# Altium PCB AD5541.PcbDoc
Units mm, origin at the board's own origin, x right, y up, seen from the top; angles counter-clockwise.
Board outline 64.13 x 29.21 mm, 2 copper layers (Top Layer, Bottom Layer); 40 components, 20 nets, 121 pads, 208 vias.
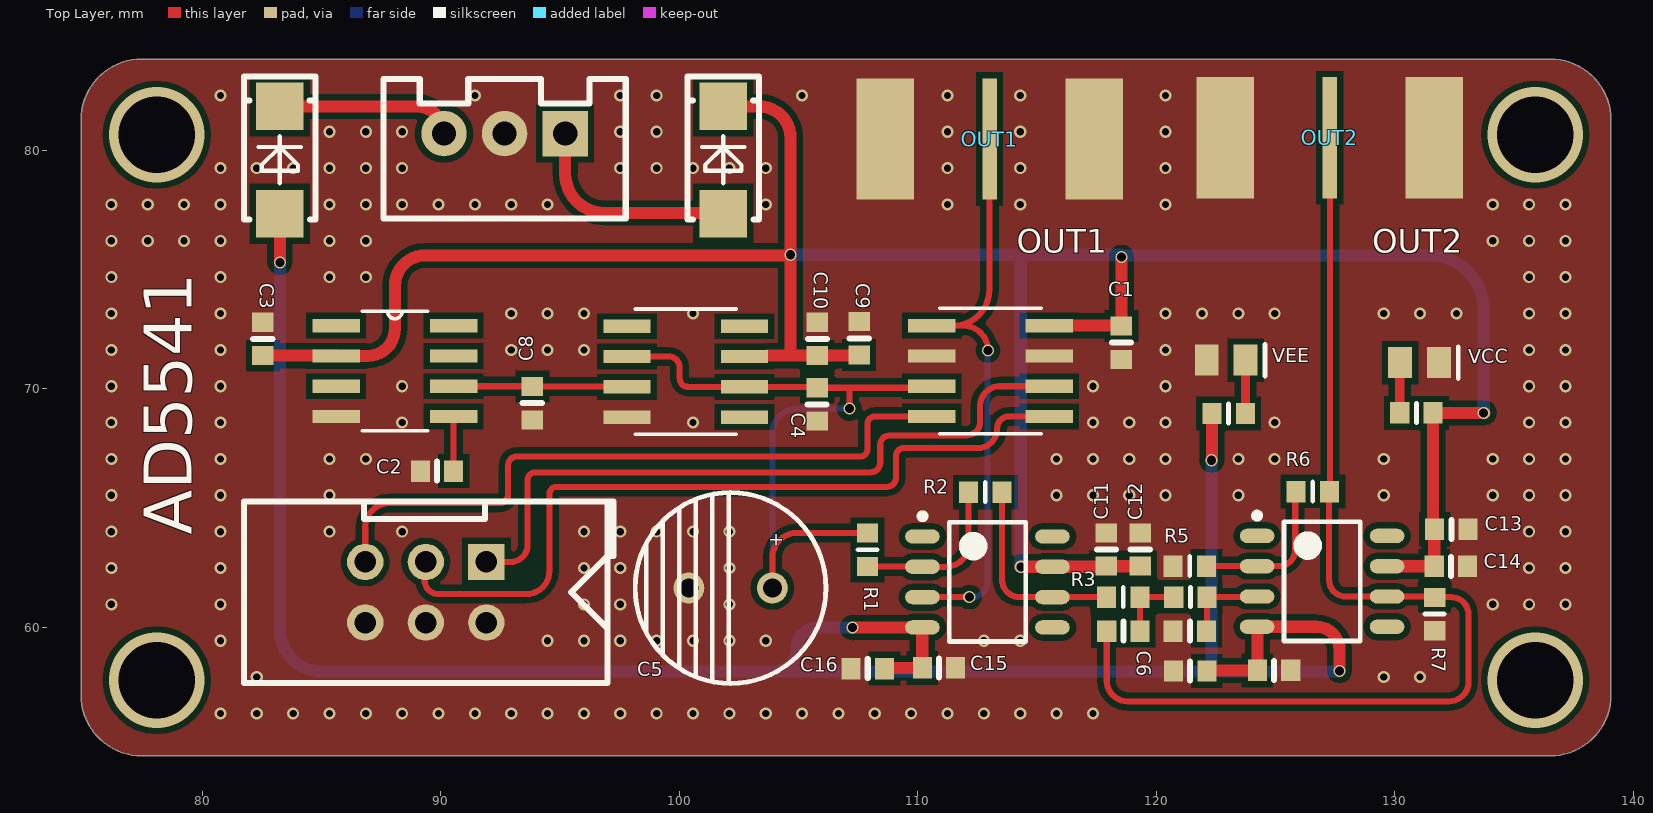
[diagram p0: Top Layer view]
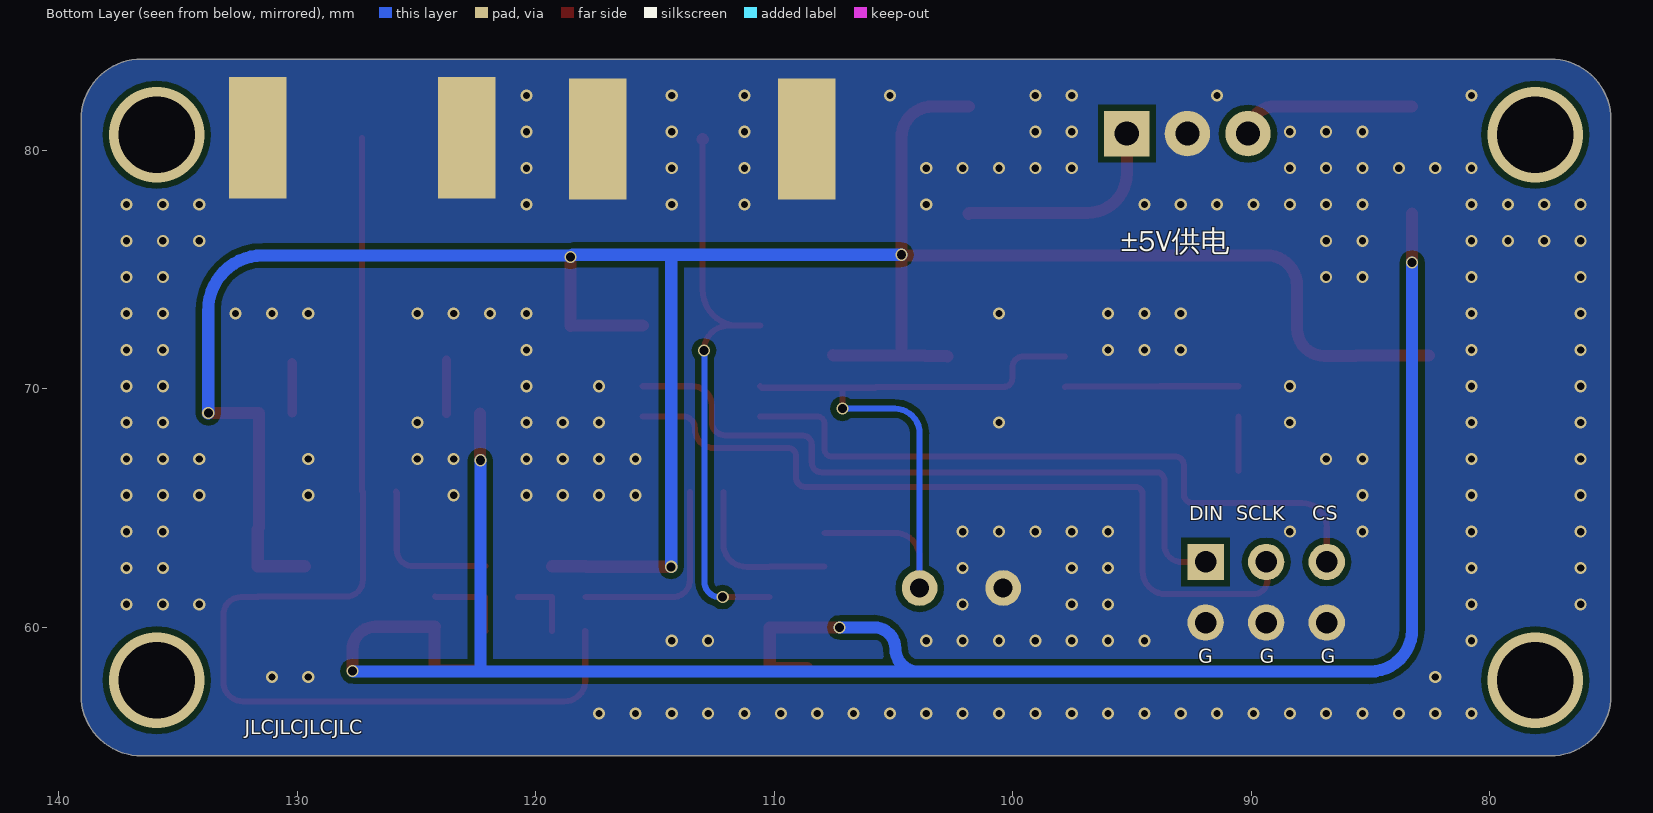
[diagram p1: Bottom Layer view, seen from below]
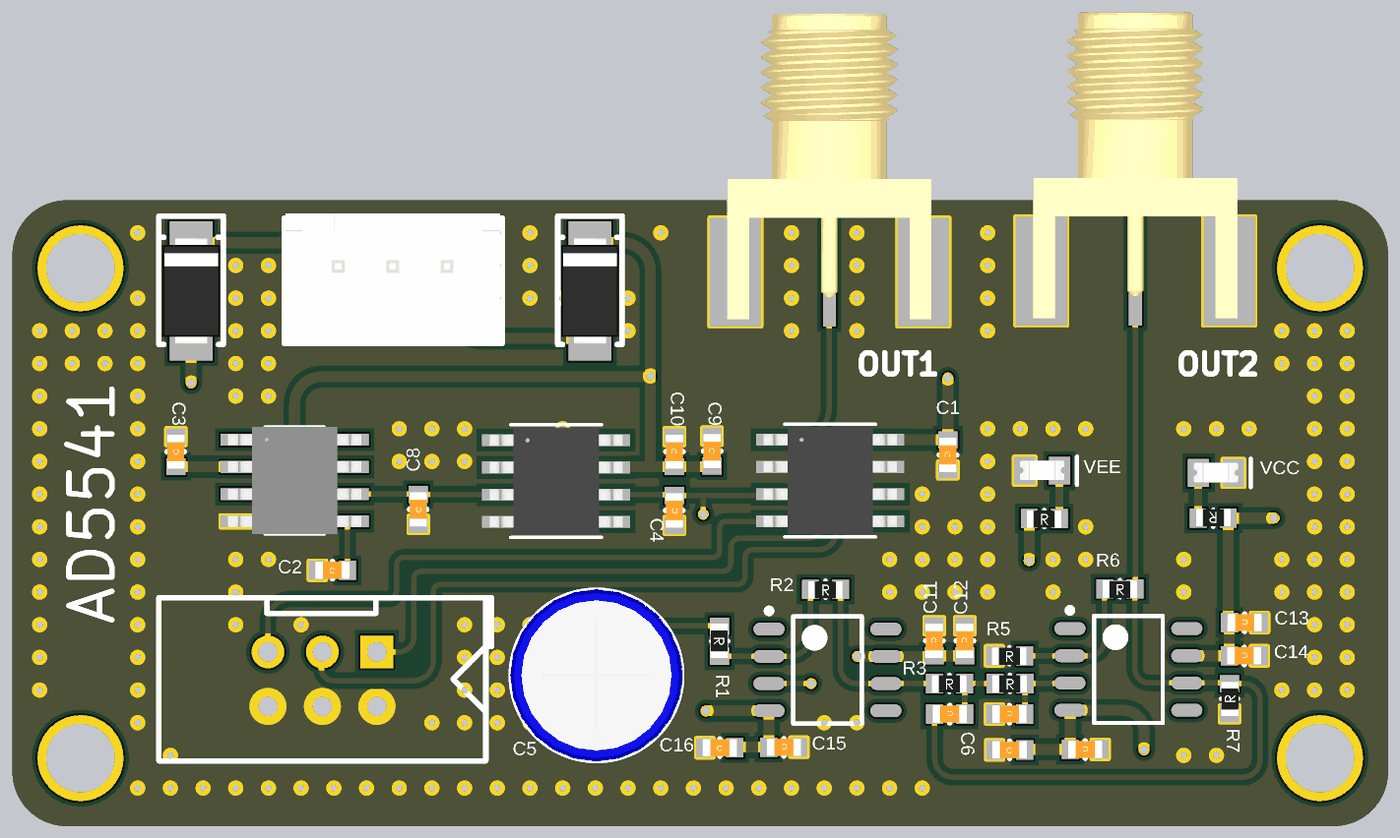
[diagram p2: 3D render of the assembled board from above, using the file's embedded part models]

## Layer stack, top to bottom
Top Solder: solder mask 0.0102, Solder Resist, Dk 3.5
Top Layer: signal copper 0.0356
Dielectric 1: dielectric 0.32, FR-4, Dk 4.8
Bottom Layer: signal copper 0.0356
Bottom Solder: solder mask 0.0102, Solder Resist, Dk 3.5

## Board outline
74.93,57.15 ccw(c77.47,57.15) 77.47,54.61 136.525,54.61 ccw(c136.525,57.15) 139.065,57.15 139.065,81.28 ccw(c136.525,81.28) 136.525,83.82 77.47,83.82 ccw(c77.47,81.28) 74.93,81.28

## Design rules (kind name [scope] priority, off if disabled: settings)
Clearance [All] p1: gap=0.254 ignorepadtopadclearanceinfootprint=FALSE except(0: Arc-Hole Track-Hole SMDPad-Hole THPad-Hole Via-Hole Fill-Hole Poly-Hole Region-Hole Text-Hole)
PolygonConnect [All] p1: connectstyle=Direct reliefconductorwidth=0.254 reliefentries=4 polygonreliefangle="90 Angle" airgapwidth=0.254
RoutingVias [All] p1: holewidth=0.711 width=1.27 viastyle="Through Hole" minholewidth=0.711 minwidth=1.27 maxholewidth=0.711 maxwidth=1.27
SolderMaskExpansion [All] p1: expansion=0.102 istentingtop=FALSE
Width [All] p1: maxlimit=2.54 minlimit=0.254 preferedwidth=0.254
30 further rules are at their usual default settings.

## Classes and differential pairs
component class AD5541: C1 C2 C3 C4 C5 C6 C8 C9 C10 C11 C12 C13 C14 C15 C16 OUT1 OUT2 R1 R2 R3 R5 R6 R7

## Components (designator, comment, footprint, x,y, rotation, side; value= is the part's Value field where it differs from the comment)
C1 "Cap-S" C0603-L 118.542,71.933 r270 top value=100nF
C2 "Cap-S" C0603-L 89.851,66.548 r0 top value=1uF
C3 "Cap-S" C0603-L 82.55,72.085 r90 top value=1uF
C4 "Cap-S" C0603-L 105.791,69.342 r90 top value=100nF
C5 "C" C-DIP-8 102.184,61.646 r180 top value=10uF
C6 "Cap-S" C0603-L 118.629,59.842 r180 top value=4.7nF
C7 "Cap-S" C0603-L 121.412,59.842 r180 top value=4.7nF
C8 "Cap-S" C0603-L 93.853,69.393 r90 top value=10uF
C9 "Cap-S" C0603-L 107.544,72.111 r270 top value=100nF
C10 "Cap-S" C0603-L 105.791,72.085 r270 top value=10uF
C11 "Cap-S" C0603-L 117.907,63.26 r270 top value=100nF
C12 "Cap-S" C0603-L 119.329,63.26 r270 top value=10uF
C13 "Cap-S" C0603-L 132.374,64.11 r180 top value=100nF
C14 "Cap-S" C0603-L 132.359,62.56 r180 top value=10uF
C15 "Cap-S" C0603-L 110.896,58.293 r180 top value=100nF
C16 "Cap-S" C0603-L 107.91,58.268 r0 top value=10uF
C17 "Cap-S" C0603-L 124.943,58.191 r180 top value=100nF
C18 "Cap-S" C0603-L 121.423,58.166 r0 top value=10uF
D1 "D" D-SMA 101.854,79.586 r90 top
D2 "D" D-SMA 83.263,79.586 r90 top
J1 "DC-6P" DC-6P 87.224,61.341 r180 top
J2 "Power-3P" SIPA03 95.225,80.696 r180 top
LED1 "LED" Led-0805_L 131.039,71.095 r0 top
LED2 "LED" Led-0805_L 122.936,71.196 r0 top
OUT1 "SMA" SMA1 113.017,80.467 r270 top
OUT2 "SMA" SMA1 127.279,80.518 r270 top
R1 "R" R0603-L 107.899,63.246 r270 top value=28K
R2 "R" R0603-L 112.838,65.659 r0 top value=28K
R3 "R" R0603-L 118.618,61.265 r0 top value=330R
R4 "R" R0603-L 121.437,61.265 r0 top value=240R
R5 "R" R0603-L 121.412,62.56 r0 top value=1K
R6 "R" R0603-L 126.568,65.684 r0 top value=1K
R7 "R" R0603-L 131.674,60.554 r90 top value=1K
U1 "AD5541ARZ" R_8_ADI 113.055,70.739 r0 top
U2 "REF5025AID" D8 88.087,70.739 r0 top
U3 "AD8628ARZ" R_8_ADI 100.279,70.714 r0 top
U4 "OPA192" SOIC127P600X175-8N 112.928,61.9 r0 top
U5 "OPA192" SOIC127P600X175-8N 126.956,61.925 r0 top
VCC "R" R0603-L 130.912,68.986 r180 top value=1K (schematic designator R8)
VEE "R" R0603-L 123.038,68.961 r0 top value=1K (schematic designator R9)

## Footprints (in the part's own frame and the unit in brackets; to place one, negate y for a bottom-side part, rotate by r counter-clockwise, add the part's x,y. Pads: shape width x height; smd on the part's side, far side on the other; paste and mask are expansions set on the pad)
C0603-L [mm] "贴片电容0603 高密度"
  rect 0.8x0.9 smd: 1(-0.7,0) 2(0.7,0)
  silkscreen extent 0,-0.39 0,0.41, body extent -0.8,-0.4 0.8,0.41, height 0.88
C-DIP-8 [mm] "3.5*8*12mm  470uF/25V"
  round 1.3 / inner round 1.3 / far side round 1.5 hole 0.8: 1(-1.725,0) 2(1.775,0)
  silkscreen extent -3.97,-4 4.03,4, body extent -4,-4.03 4.05,4.03, height 11.83
D8 [mil]
  rect 78x22 smd: 1(-97,75) 2(-97,25) 3(-97,-25) 4(-97,-75) 5(97,-75) 6(97,-25) 7(97,25) 8(97,75)
  silkscreen extent -54,-98 54,98, body extent -122,-99 122,99, height 69
D-SMA [mm]
  rect 2x2 smd: 1(-2.25,0) 2(2.25,0)
  silkscreen extent -2.5,-1.5 3.5,1.5, body extent -2.5,-1.35 2.5,1.35, height 2.15
DC-6P [mil]
  rect 60x60 hole 35.43: 1(-185,-55)
  round 60 hole 35.43: 2(-85,-55) 3(15,-55) 4(15,45) 5(-85,45) 6(-185,45)
  silkscreen extent -395,-155 215,145, body extent -386,-156 216,145, height 236
Led-0805_L [mm] "贴片LED0805-高密度"
  rect 1x1.3 smd: 1(-0.813,0) 2(0.813,0)
  silkscreen extent 1.63,-0.66 1.63,0.66, body extent -1.03,-0.44 1.03,0.47, height 0.85
R0603-L [mm] "贴片电阻0603 高密度"
  rect 0.8x0.9 smd: 1(-0.7,0) 2(0.7,0)
  silkscreen extent 0,-0.39 0,0.41, body extent -0.81,-0.43 0.79,0.39, height 0.53
R_8_ADI [mil]
  rect 78x22 smd paste+0 mask+0: 1(-97,75) 2(-97,25) 3(-97,-25) 4(-97,-75) 5(97,-75) 6(97,-25) 7(97,25) 8(97,75)
  silkscreen extent -84,-104 84,104, body extent -122,-99 122,99, height 69
SIPA03 [mil]
  rect 75x75 hole 40: 1(0,0)
  round 75 hole 40: 2(100,0) 3(200,0)
  silkscreen extent -100,-90 300,140, body extent -96,-99 298,137, height 276
SMA1 [mil]
  rect 200x24 smd: 1(0,0)
  rect 200x95 smd: 2(0,172.5) 2(0,-172.5)
  rect 200x95 smd far side mask+4: 2(0,172.5)
  rect 200x95 smd far side: 2(0,-172.5)
  body extent -475,-187 87,187, height 171
SOIC127P600X175-8N [mm] "SOIC, 8-Leads, Body 4.91x3.90mm, Pitch 1.27mm, IPC Medium Density"
  oval 1.45x0.6 smd: 1(-2.725,1.905) 2(-2.725,0.635) 3(-2.725,-0.635) 4(-2.725,-1.905) 5(2.725,-1.905) 6(2.725,-0.635) 7(2.725,0.635) 8(2.725,1.905)
  silkscreen extent -2.85,-2.5 1.6,2.88, body extent -2,-2.5 2,2.5, height 1.75

## Part data
C1 C2 C3 C4 C6 C7 C8 C9 C10 C11 C12 C13 C14 C15 C16 C17 C18: "贴片瓷片电容"
C5: library part Cap-Pol-ER, "极性直插电解电容"
D1 D2: library part Diode, "二极管"
J2: "供电端子"
LED1 LED2: "发光二极管"
R1 R2 R3 R4 R5 R6 R7 VCC VEE: library part Res, "贴片电阻"
U1 U3: "No Description Available", Mfr_Name="Analog Devices Inc", Copyright="Copyright (C) 2021 Ultra Librarian. All rights reserved.", RefDes=RefDes, Type=DEV
  U1: Manufacturer_Part_Number=AD5541ARZ
  U3: Manufacturer_Part_Number=AD8628ARZ
U2: "No Description Available", Mfr_Name="Texas Instruments", Copyright="Copyright (C) 2021 Ultra Librarian. All rights reserved.", Manufacturer_Part_Number=REF5025AID, RefDes=RefDes, Type=DEV

## Via types
v1: diameter 0.508, hole 0.305, Top Layer to Bottom Layer, 193 vias
v2: diameter 0.508, hole 0.381, Top Layer to Bottom Layer, 11 vias
v3: diameter 4, hole 3.2, Top Layer to Bottom Layer, 4 vias

## Nets (pads, with @x,y where several pads share a name; then routed paths per layer and width w, separated by ;. In a path a pad name is that pad's centre, name@x,y a point inside that pad or via, vN(x,y) a via of type N, cw(c..) or ccw(c..) an arc to the next point about the centre after c; other vN are vias at no path point)
CS: J1.3 U1.4 | length 28.8
  Top Layer w0.254: J1.3 86.843,64.186 cw(c87.859,64.186) 87.859,65.202 92.456,65.202 ccw(c92.456,65.583) 92.837,65.583 92.837,66.802 cw(c93.193,66.802) 93.193,67.158 107.594,67.158 ccw(c107.594,67.462) 107.899,67.462 107.899,68.529 cw(c108.204,68.529) 108.204,68.834 U1.4
DAC_O: OUT1.1 U1.1 U4.3 | length 24.4
  Top Layer w0.254: U4.3 v2(112.166,61.265) ; U1.1 111.912,72.644 cw(c111.912,71.603) v2(112.954,71.603) ; U1.1@111.506,72.644 ccw(c111.506,74.143) 113.005,74.143 OUT1.1@113.005,80.454
  Top Layer w0.508: OUT1.1@113.005,80.454 OUT1.1
  Bottom Layer w0.254: v2(112.166,61.265) 112.293,61.265 ccw(c112.293,61.9) 112.928,61.9 112.928,71.577 cw(c112.954,71.577) v2(112.954,71.603)
DIN: J1.1 U1.6 | length 29.6
  Top Layer w0.254: J1.1 92.939,62.738 ccw(c92.939,63.449) 93.65,63.449 93.65,66.167 cw(c93.98,66.167) 93.98,66.497 108.026,66.497 ccw(c108.026,66.904) 108.433,66.904 108.433,67.64 cw(c108.839,67.64) 108.839,68.047 112.065,68.047 ccw(c112.065,68.605) 112.624,68.605 112.624,69.291 cw(c113.436,69.291) 113.436,70.104 U1.6
GND: C1.2 C2.1 C3.2 C4.1 C5.2 C7.2 C8.1 C9.1 C10.1 C11.1 C12.1 C13.1 C14.1 C15.1 C16.1 C17.1 C18.1 J1.4 J1.5 J1.6 J2.2 LED1.2 LED2.1 OUT1.2 OUT2.2 R5.1 R7.1 U1.2 U1.7 U2.4 U3.4
  other v1: 80.772,56.388 82.296,56.388 83.82,56.388 85.344,56.388 86.868,56.388 88.392,56.388 89.916,56.388 91.44,56.388 92.964,56.388 94.488,56.388 96.012,56.388 97.536,56.388 99.06,56.388 100.584,56.388 102.108,56.388 103.632,56.388 105.156,56.388 106.68,56.388 108.204,56.388 109.728,56.388 111.252,56.388 112.776,56.388 114.3,56.388 115.824,56.388 117.348,56.388 82.296,57.912 129.54,57.912 131.064,57.912 80.772,59.436 94.488,59.436 96.012,59.436 97.536,59.436 99.06,59.436 100.584,59.436 102.108,59.436 103.632,59.436 112.776,59.436 114.3,59.436 76.2,60.96 80.772,60.96 96.012,60.96 97.536,60.96 102.108,60.96 134.112,60.96 135.636,60.96 137.16,60.96 76.2,62.484 80.772,62.484 96.012,62.484 97.536,62.484 102.108,62.484 135.636,62.484 137.16,62.484 76.2,64.008 80.772,64.008 85.344,64.008 88.392,64.008 96.012,64.008 97.536,64.008 99.06,64.008 100.584,64.008 102.108,64.008 135.636,64.008 137.16,64.008 76.2,65.532 80.772,65.532 85.344,65.532 115.824,65.532 117.348,65.532 118.872,65.532 120.396,65.532 123.444,65.532 129.54,65.532 134.112,65.532 135.636,65.532 137.16,65.532 76.2,67.056 80.772,67.056 85.344,67.056 86.868,67.056 115.824,67.056 117.348,67.056 118.872,67.056 120.396,67.056 123.444,67.056 124.968,67.056 129.54,67.056 134.112,67.056 135.636,67.056 137.16,67.056 76.2,68.58 80.772,68.58 88.392,68.58 100.584,68.58 117.348,68.58 118.872,68.58 120.396,68.58 124.968,68.58 135.636,68.58 137.16,68.58 76.2,70.104 80.772,70.104 88.392,70.104 117.348,70.104 120.396,70.104 135.636,70.104 137.16,70.104 76.2,71.628 80.772,71.628 92.964,71.628 94.488,71.628 96.012,71.628 120.396,71.628 135.636,71.628 137.16,71.628 76.2,73.152 80.772,73.152 92.964,73.152 94.488,73.152 96.012,73.152 100.584,73.152 120.396,73.152 121.92,73.152 123.444,73.152 124.968,73.152 129.54,73.152 131.064,73.152 132.588,73.152 135.636,73.152 137.16,73.152 76.2,74.676 80.772,74.676 85.344,74.676 86.868,74.676 135.636,74.676 137.16,74.676 76.2,76.2 77.724,76.2 79.248,76.2 80.772,76.2 85.344,76.2 86.868,76.2 134.112,76.2 135.636,76.2 137.16,76.2 76.2,77.724 77.724,77.724 79.248,77.724 80.772,77.724 85.344,77.724 86.868,77.724 88.392,77.724 89.916,77.724 91.44,77.724 92.964,77.724 94.488,77.724 103.632,77.724 111.252,77.724 114.3,77.724 120.396,77.724 134.112,77.724 135.636,77.724 137.16,77.724 80.772,79.248 82.296,79.248 83.82,79.248 85.344,79.248 86.868,79.248 88.392,79.248 97.536,79.248 99.06,79.248 100.584,79.248 102.108,79.248 103.632,79.248 111.252,79.248 114.3,79.248 120.396,79.248 85.344,80.772 86.868,80.772 88.392,80.772 97.536,80.772 99.06,80.772 111.252,80.772 114.3,80.772 120.396,80.772 80.772,82.296 91.44,82.296 97.536,82.296 99.06,82.296 105.156,82.296 111.252,82.296 114.3,82.296 120.396,82.296
NetC2_2: C2.2 U2.5 | length 2.3
  Top Layer w0.254: C2.2 U2.5
NetC6_1: C6.1 R3.2 R4.1 | length 2.8
  Top Layer w0.254: C6.1 119.329,61.254 R3.2 R4.1
NetC6_2: C6.2 OUT2.1 R6.2 R7.2 U5.6 | length 46.3
  Top Layer w0.254: C6.2 117.929,57.763 ccw(c118.796,57.763) 118.796,56.896 132.283,56.896 ccw(c132.283,57.709) 133.096,57.709 133.096,60.528 ccw(c132.359,60.528) 132.359,61.265 131.662,61.265 cw(c131.662,61.29) 131.637,61.29 U5.6 127.94,61.29 cw(c127.94,61.976) 127.254,61.976 127.254,65.684 R6.2 127.279,65.696 OUT2.1
NetC7_1: C7.1 R4.2 U5.3 | length 3.5
  Top Layer w0.254: C7.1 ccw(c122.112,59.868) 122.137,59.868 R4.2 124.206,61.265 U5.3
NetC8_2: C8.2 U2.6 U3.3 | length 7.3
  Top Layer w0.254: U2.6 93.842,70.104 C8.2 97.801,70.093 U3.3
NetD1_1: D1.1 J2.1 | length 9.3
  Top Layer w0.508: J2.1 95.225,79.019 ccw(c96.876,79.019) 96.876,77.368 101.822,77.368 cw(c101.822,77.336) D1.1
NetD2_2: D2.2 J2.3 | length 7.5
  Top Layer w0.508: D2.2 89.004,81.836 cw(c89.004,80.696) J2.3
NetLED1_1: LED1.1 VCC.2 | length 2.1
  Top Layer w0.381: VCC.2 130.212,71.08 LED1.1
NetLED2_2: LED2.2 VEE.2 | length 2.2
  Top Layer w0.381: VEE.2 123.738,71.185 LED2.2
NetR1_2: R1.2 R2.1 U4.2 | length 7
  Top Layer w0.254: R1.2 110.192,62.546 U4.2 111.176,62.535 ccw(c111.176,63.5) 112.141,63.5 112.141,65.659 R2.1
NetR2_2: R2.2 R3.1 U4.6 | length 8.5
  Top Layer w0.254: R2.2 113.538,62.001 ccw(c114.275,62.001) 114.275,61.265 U4.6 R3.1
NetR5_2: R5.2 R6.1 U5.2 | length 6.6
  Top Layer w0.254: R5.2 U5.2 125.146,62.56 ccw(c125.146,63.246) 125.832,63.246 125.832,65.648 cw(c125.868,65.648) R6.1
REF: C4.2 C5.1 R1.1 U1.3 U3.2 U3.6 | length 30.8
  Top Layer w0.254: U3.2 99.568,71.349 cw(c99.568,70.891) 100.025,70.891 100.025,70.434 ccw(c100.381,70.434) 100.381,70.079 U3.6 105.754,70.079 C4.2 107.086,70.042 ; C5.1 103.909,62.913 cw(c104.953,62.913) 104.953,63.957 107.899,63.957 R1.1 ; v2(107.137,69.164) 107.137,69.991 ccw(c107.086,69.991) 107.086,70.042 ; U1.3 110.53,70.042 107.086,70.042
  Bottom Layer w0.254: C5.1 103.909,68.12 cw(c104.953,68.12) 104.953,69.164 v2(107.137,69.164)
SCLK: J1.2 U1.5 | length 33.3
  Top Layer w0.254: J1.2 ccw(c89.383,62.687) 89.332,62.687 89.332,61.976 ccw(c89.916,61.976) 89.916,61.392 93.599,61.392 ccw(c93.599,62.357) 94.564,62.357 94.564,65.583 cw(c94.869,65.583) 94.869,65.888 108.712,65.888 ccw(c108.712,66.269) 109.093,66.269 109.093,67.183 cw(c109.423,67.183) 109.423,67.513 112.522,67.513 ccw(c112.522,68.326) 113.335,68.326 113.335,68.351 cw(c113.817,68.351) 113.817,68.834 U1.5
VCC: C1.1 C3.1 C9.2 C10.2 C11.2 C12.2 C13.2 C14.2 D1.2 U1.8 U2.2 U3.7 U4.7 U5.7 VCC.1 | length 112.3
  Top Layer w0.508: C3.1 85.612,71.385 U2.2 86.944,71.374 ccw(c86.944,72.517) 88.087,72.517 88.087,74.32 cw(c89.357,74.32) 89.357,75.59 104.648,75.59 v2(104.673,75.616) ; D1.2 103.355,81.836 cw(c103.355,80.518) 104.673,80.518 v2(104.673,75.616) ; U3.7 102.768,71.374 103.679,71.374 103.69,71.385 104.813,71.385 ; C9.2 107.518,71.385 C10.2 104.813,71.385 ; v2(114.325,62.535) U4.7 117.881,62.535 C11.2 C12.2 ; U1.8 118.531,72.644 C1.1 v2(118.542,75.527) ; U5.7 C14.2 131.659,64.095 C13.2 131.612,64.172 VCC.1 v2@133.758,68.986 ; v2(104.673,75.616) 104.673,71.525 ccw(c104.813,71.525) 104.813,71.385
  Bottom Layer w0.508: v2(104.673,75.616) 114.3,75.616 ; v2(114.325,62.535) 114.325,75.59 ccw(c114.3,75.59) 114.3,75.616 ; v2@133.731,68.961 133.731,73.304 ccw(c131.445,73.304) 131.445,75.59 118.605,75.59 v2(118.542,75.527) ccw(c118.453,75.527) 118.453,75.616 114.3,75.616
  other v2: 133.731,68.986
VEE: C15.2 C16.2 C17.2 C18.2 D2.1 U4.4 U5.4 VEE.1 | length 93.1
  Top Layer w0.508: v2(83.263,75.287) D2.1 ; v2@107.264,59.969 cw(c107.29,59.969) 107.29,59.995 U4.4 110.196,59.988 C15.2 108.636,58.293 C16.2 ; C18.2 122.149,58.191 C17.2 124.243,60.009 U5.4 126.721,60.02 cw(c126.721,59.055) 127.686,59.055 v2(127.686,58.166) ; v2(122.326,67.001) 122.338,67.001 VEE.1
  Bottom Layer w0.508: v2(83.263,75.287) 83.263,59.917 ccw(c85.039,59.917) 85.039,58.141 103.962,58.141 ; v2(107.264,59.995) 105.816,59.995 ccw(c105.816,59.106) 104.927,59.106 cw(c103.962,59.106) 103.962,58.141 ; v2(122.326,67.001) 122.326,58.141 ; v2@127.66,58.141 122.326,58.141 ; 103.962,58.141 122.326,58.141
pads on no net: U2.1 U2.3 U2.7 U2.8 U3.1 U3.5 U3.8 U4.1 U4.5 U4.8 U5.1 U5.5 U5.8
copper on no net:
  other v3: 78.105,57.785 135.89,57.785 78.105,80.645 135.89,80.645

## Polygon pours and split planes (outlines as drawn)
GND on Top Layer "GND_TOP" (solid, pour order 0): 74.93,57.15 ccw(c77.47,57.15) 77.47,54.61 136.525,54.61 ccw(c136.525,57.15) 139.065,57.15 139.065,81.28 ccw(c136.525,81.28) 136.525,83.82 77.47,83.82 ccw(c77.47,81.28) 74.93,81.28
GND on Bottom Layer "GND_BUT" (solid, pour order 1): 74.93,57.15 ccw(c77.47,57.15) 77.47,54.61 136.525,54.61 ccw(c136.525,57.15) 139.065,57.15 139.065,81.28 ccw(c136.525,81.28) 136.525,83.82 77.47,83.82 ccw(c77.47,81.28) 74.93,81.28

## Silkscreen, mask and mechanical layers (free items; w line width, h text height)
Top Overlay:
  text "OUT1" at 114.148,75.692 h1
  text "OUT2" at 129.057,75.692 h1
  text "AD5541" at 79.578,63.881 h2 r90
Bottom Overlay:
  text "±5V供电" at 95.479,75.48 h1.52
  text "DIN" at 92.608,64.284 h1
  text "CS" at 87.452,64.273 h1
  text "SCLK" at 90.627,64.273 h1
  text "G" at 87.097,58.279 h1
  text "G" at 89.662,58.279 h1
  text "G" at 92.227,58.279 h1
  text "JLCJLCJLCJLC" at 132.209,55.307 h1
Bottom Solder:
  rectangle: 130.175,77.902 132.588,83.033
  rectangle: 116.053,77.699 118.466,82.829
Mechanical 1:
  the board outline again, w0.254

## Text inside footprints (layer, text, board x,y; h text height)
C5: Top Overlay "+" at 104.416,64.11 h1 r180
U1: Mechanical 13 "*" at 111.125,71.895 h1.27
U3: Mechanical 13 "*" at 98.349,71.869 h1.27